# EAGLE board Temp_Ctrlr_Board_final (EAGLE 9.7.0)
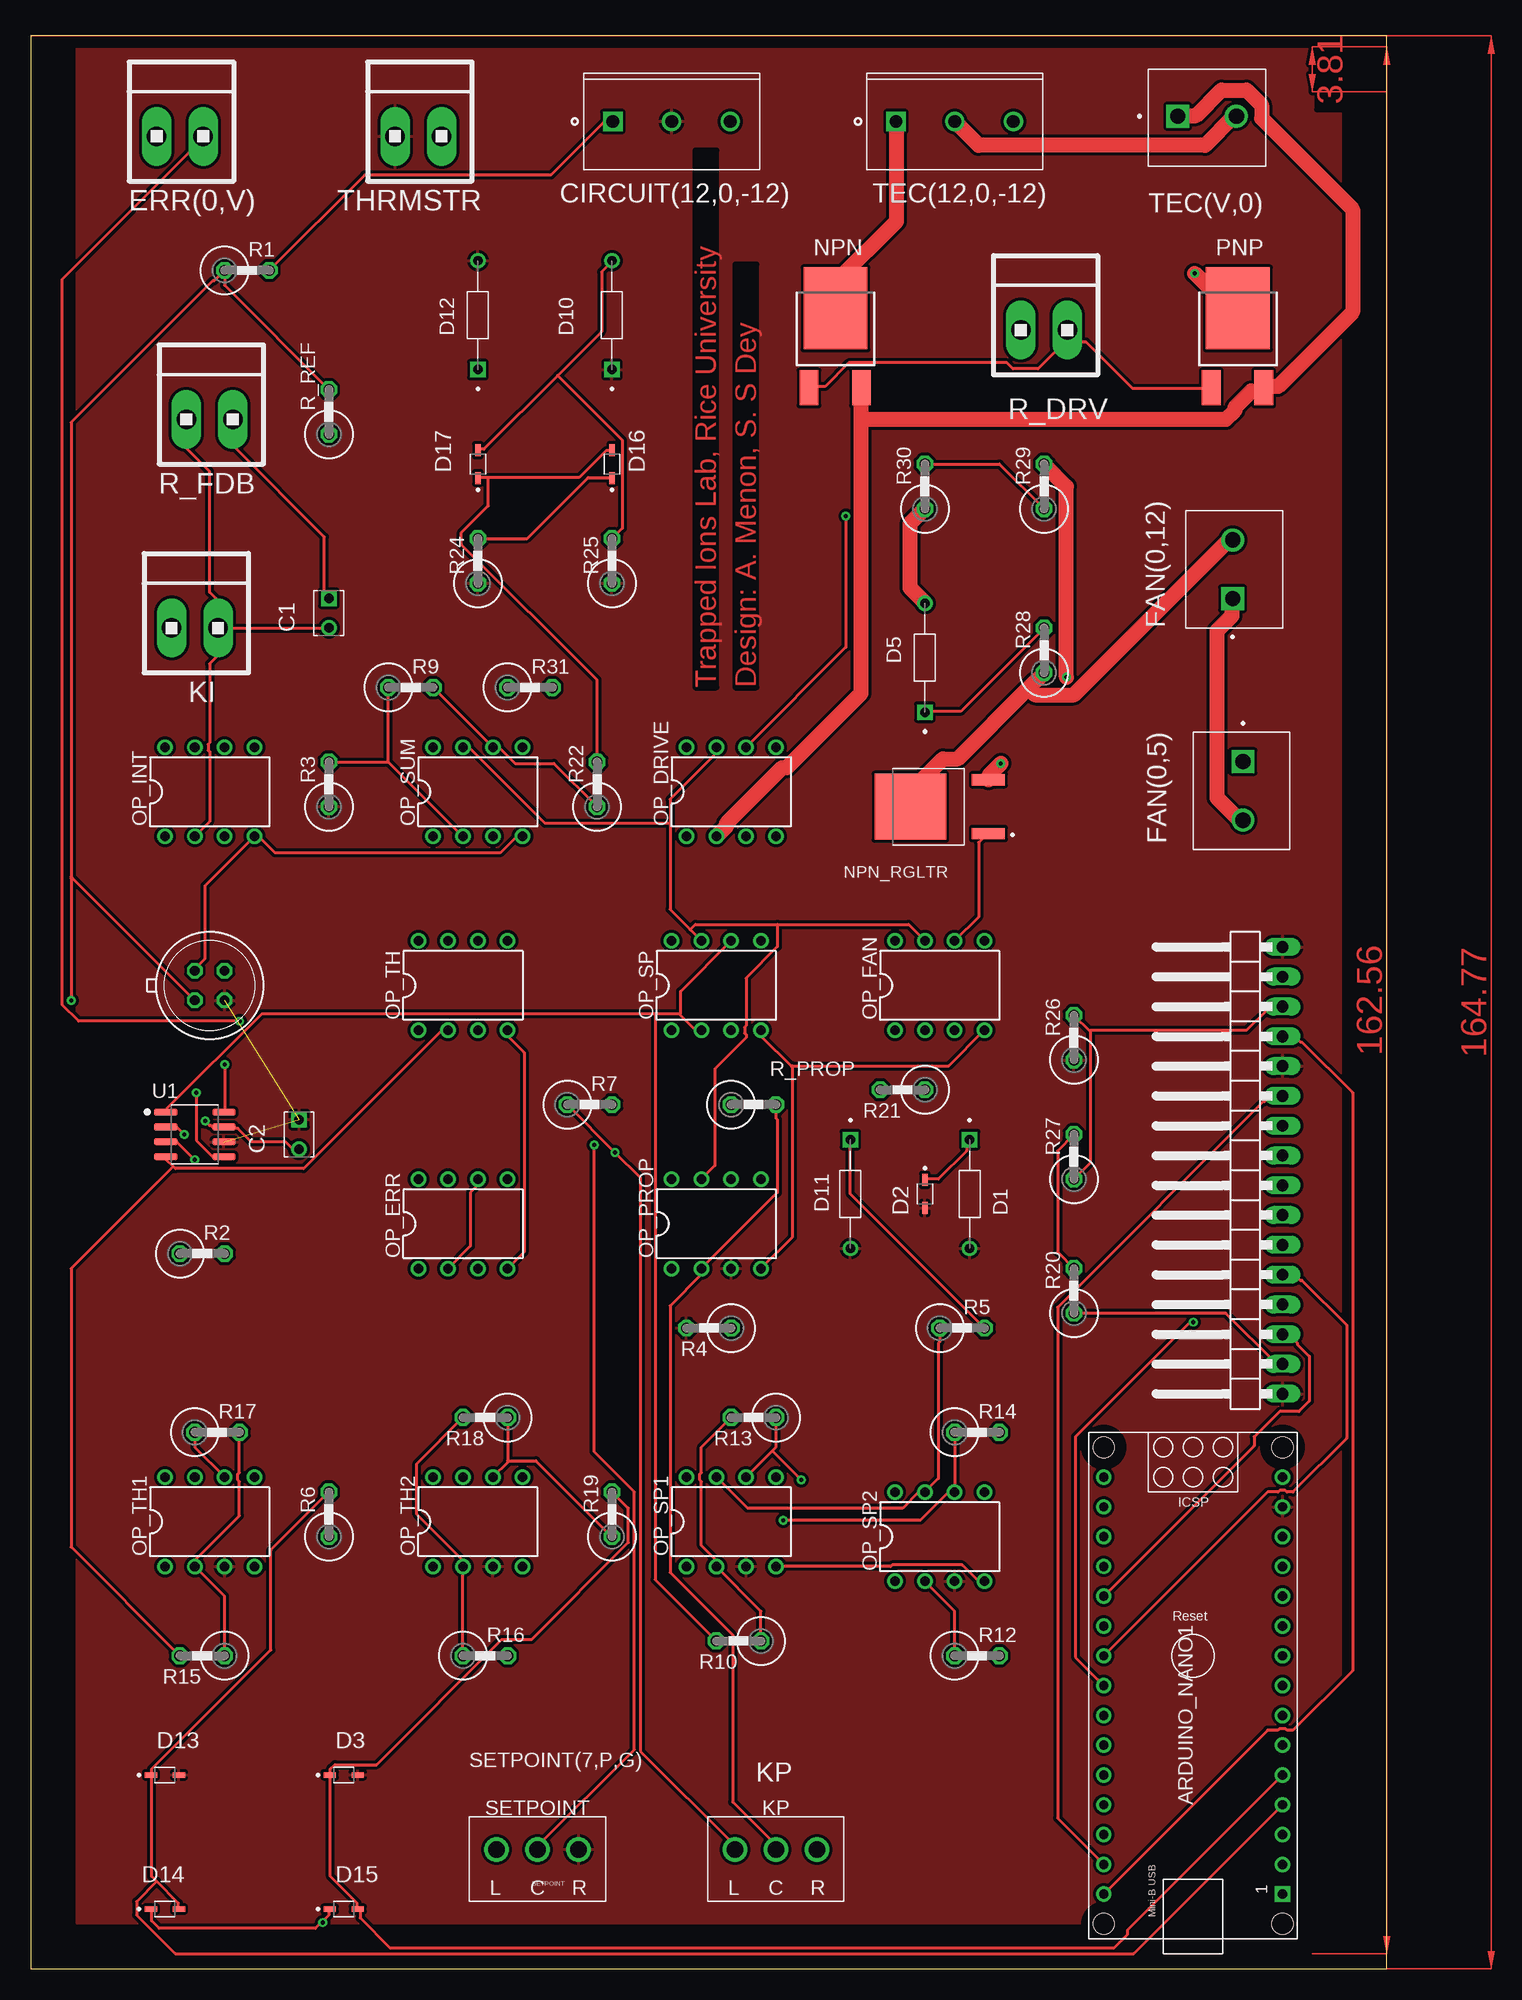
[diagram p0: board, top side]
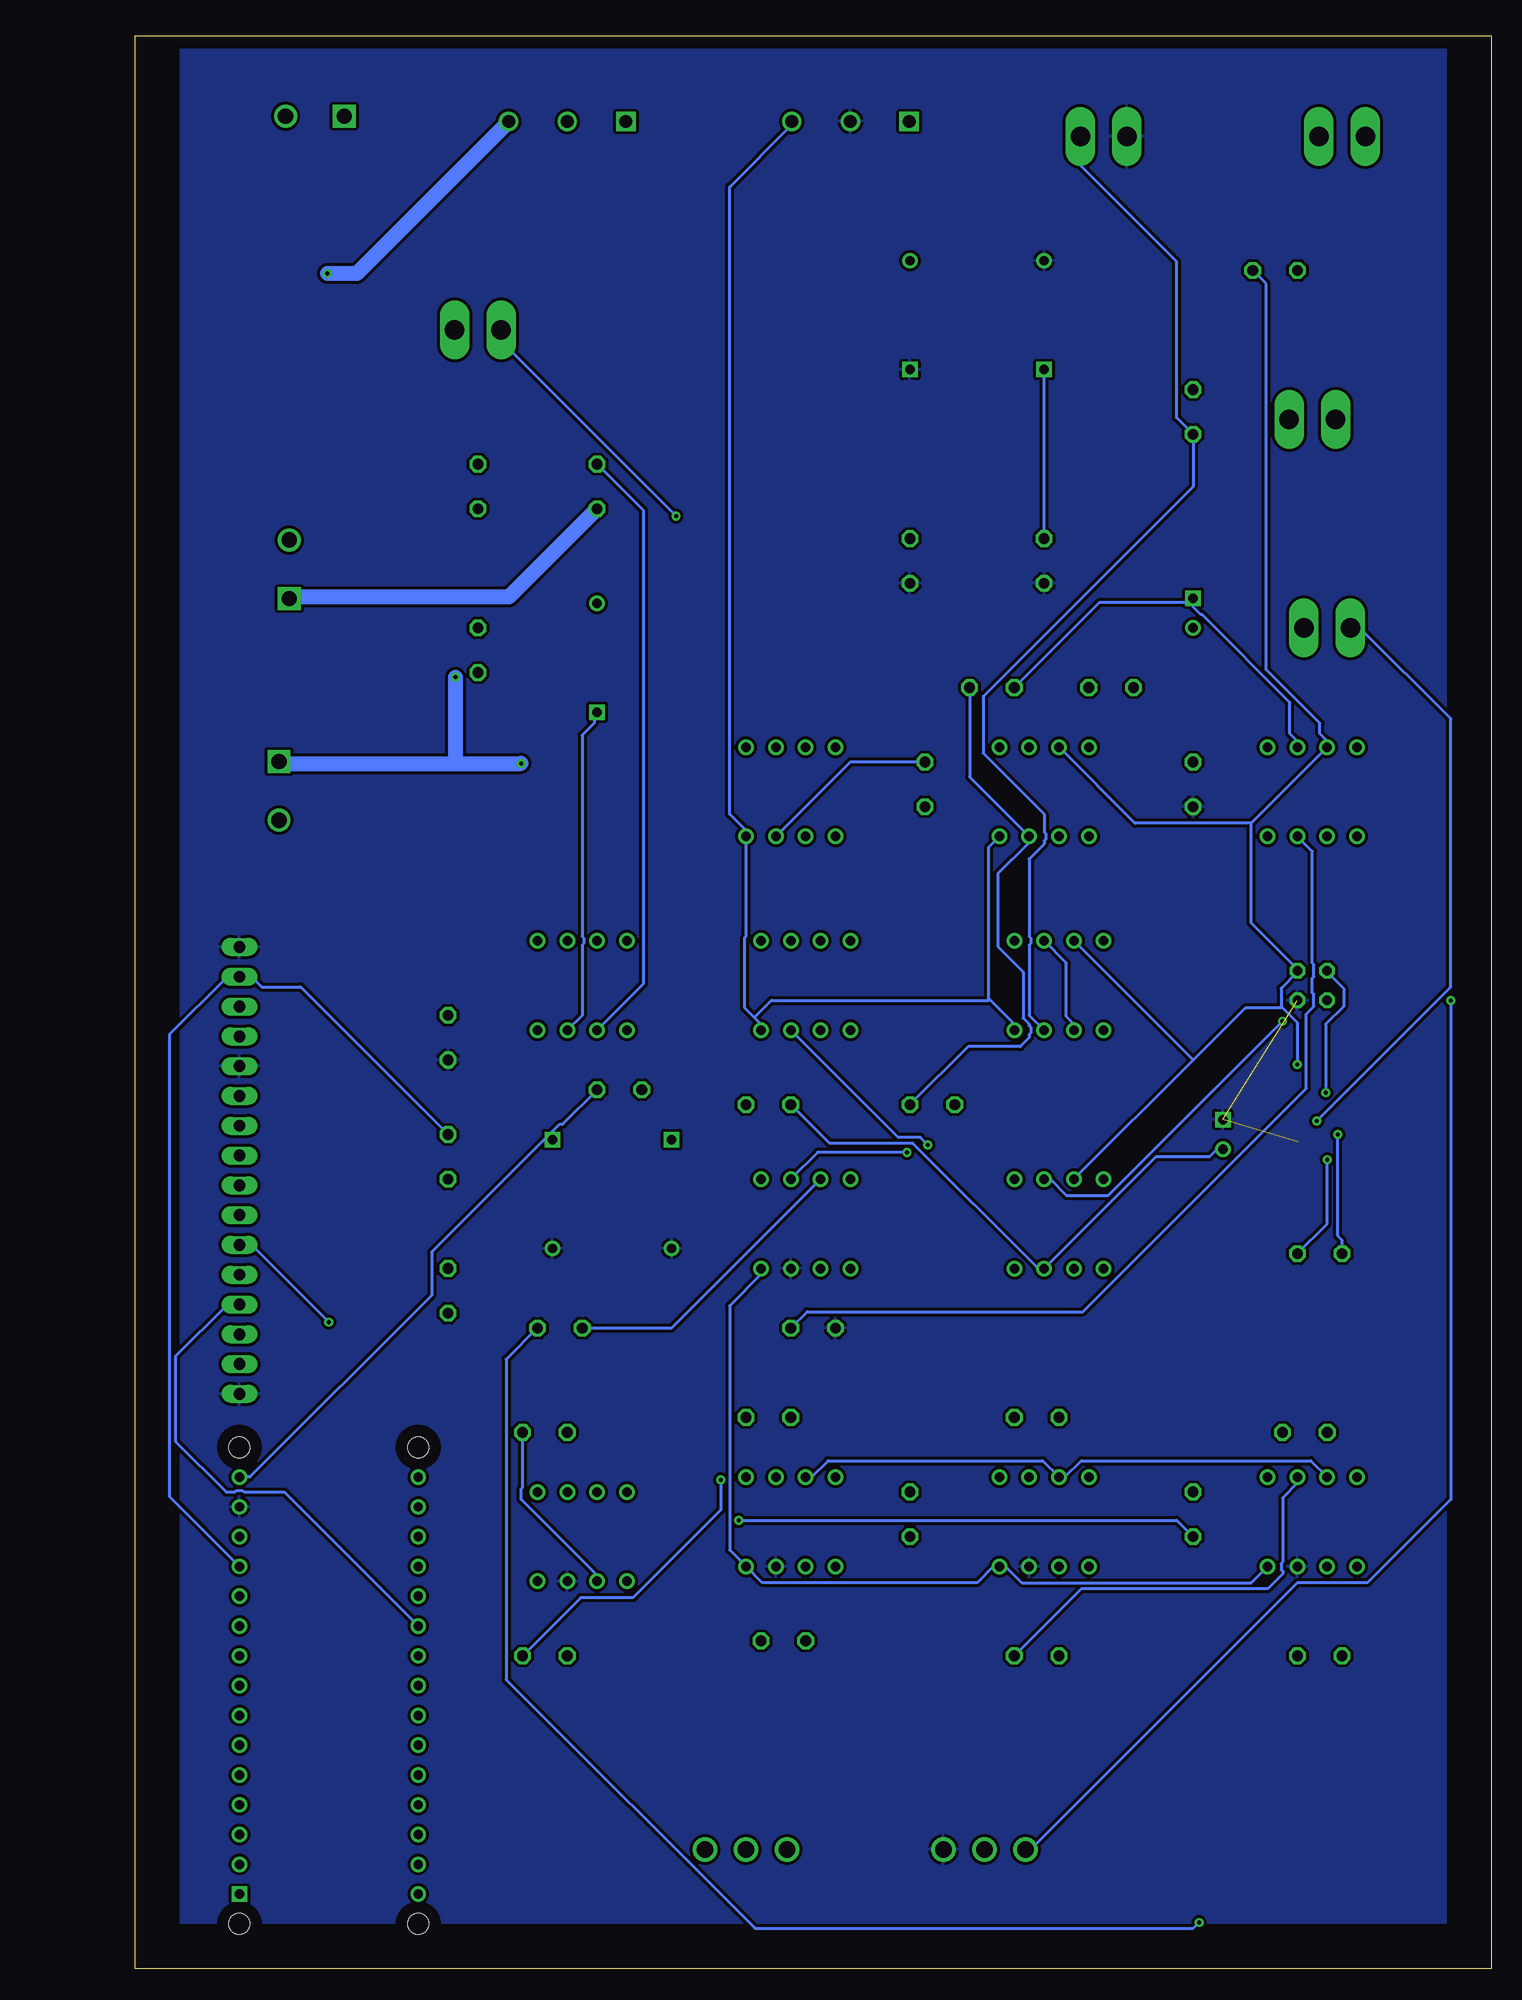
[diagram p1: board, bottom side, seen from below]

Size 115.55 x 164.77 mm. Coordinates in mm from the lower left corner, seen from the top.
Outline: 0,0 115.55,0 115.55,164.77 0,164.77 0,0
Copper layers (1*16): Top 0.035mm / dielectric 1.5mm / Bottom 0.035mm
Design rules "default": minimum track width 6mil, minimum drill 0.35mm, track to track 6mil, track to pad 6mil, pad to pad 6mil, via to via 6mil, smd to smd 6mil, copper to edge 40mil, drill to drill 6mil, minimum pad ring 10mil, minimum via ring 8mil, stop-mask expansion 4mil, vias tented up to drill 0mil, thermal gap 10mil
Net classes: 0 default: width 0.254 mm, clearance 0.254 mm; 1 opamp_driving: width 0.254 mm, clearance 0.254 mm; 2 TEC_driving: width 1.27 mm, clearance 0.254 mm; 3 INA: width 0.254 mm, clearance 0.254 mm; 4 Fan: width 1.27 mm, clearance 0.254 mm

## Footprints (pad centres in the part's own frame; a part is rotated, then mirrored left to right if it is on the bottom)
ARDUINO_NANO = drill 0.8 square: 1 -20.32,-7.62 | drill 0.8: 2 -17.78,-7.62; 3 -15.24,-7.62; 4 -12.7,-7.62; 5 -10.16,-7.62; 6 -7.62,-7.62; 7 -5.08,-7.62; 8 -2.54,-7.62; 9 0,-7.62; 10 2.54,-7.62; 11 5.08,-7.62; 12 7.62,-7.62; 13 10.16,-7.62; 14 12.7,-7.62; 15 15.24,-7.62; 16 15.24,7.62; 17 12.7,7.62; 18 10.16,7.62; 19 7.62,7.62; 20 5.08,7.62; 21 2.54,7.62; 22 0,7.62; 23 -2.54,7.62; 24 -5.08,7.62; 25 -7.62,7.62; 26 -10.16,7.62; 27 -12.7,7.62; 28 -15.24,7.62; 29 -17.78,7.62; 30 -20.32,7.62 | hole 1.778: -22.86,-7.62; -22.86,7.62; 17.78,7.62; 17.78,-7.62
CAPRR254W54L381T254H466 = drill 0.81 square: 1 -1.27,0 | drill 0.81: 2 1.27,0
TE_282836-3 = drill 1.1 square: 1 -5,0 | drill 1.1: 2 0,0; 3 5,0
DIOAD928W47L399D179 = drill 0.8: A 4.64,0 | drill 0.8 square: C -4.64,0
SOD2513X120N = smd 1.04 x 0.46: A 1.19,0; C -1.19,0
1X2MTA = drill 1.676 long: 1 1.981,0; 2 -1.981,0
PHOENIX_1935161 = drill 1.3 square: 1 2.5,4.25 | drill 1.3: 2 7.5,4.25
TO39/4 = drill 0.813 octagon: 1 -1.27,-1.27; 2 1.27,-1.27; 3 1.27,1.27; 4 -1.27,1.27
691322110003 = drill 1.4: C 0,0; L -3.5,0; R 3.5,0
DPAK = smd 1.6 x 2.997: 1 -2.261,-4.928; 3 2.21,-4.928 | smd 5.452 x 7: 4 0,1.853
TO229P990X238-3N = smd 2.83 x 0.97: 1 -4.14,2.29; 3 -4.14,-2.29 | smd 6.09 x 5.63: 4 2.51,0
DIL08 = drill 0.813 pad 1.27: 1 -3.81,-3.81; 2 -1.27,-3.81; 3 1.27,-3.81; 4 3.81,-3.81; 5 3.81,3.81; 6 1.27,3.81; 7 -1.27,3.81; 8 -3.81,3.81
0411V = drill 0.914 octagon: 1 -2.54,0; 2 1.27,0
1X16/90 = drill 1.016 long: 1 -19.05,-3.81; 2 -16.51,-3.81; 3 -13.97,-3.81; 4 -11.43,-3.81; 5 -8.89,-3.81; 6 -6.35,-3.81; 7 -3.81,-3.81; 8 -1.27,-3.81; 9 1.27,-3.81; 10 3.81,-3.81; 11 6.35,-3.81; 12 8.89,-3.81; 13 11.43,-3.81; 14 13.97,-3.81; 15 16.51,-3.81; 16 19.05,-3.81
SOIC127P600X175-8N = smd 1.97 x 0.6: 1 -2.475,1.905; 2 -2.475,0.635; 3 -2.475,-0.635; 4 -2.475,-1.905; 5 2.475,-1.905; 6 2.475,-0.635; 7 2.475,0.635; 8 2.475,1.905

## Placement (x,y rotation side)
ARDUINO_NANO1  [ARDUINO_NANO]  99.06,26.67 90 top
C1  C315C470J1G5TA  [CAPRR254W54L381T254H466]  25.4,115.57 270 top
C2  C315C470J1G5TA  [CAPRR254W54L381T254H466]  22.86,71.12 270 top
CIRCUIT(12,0,-12)  282836-3  [TE_282836-3]  54.61,157.48 0 top
D1  1N5237B_A0  [DIOAD928W47L399D179]  80.01,66.04 270 top
D2  BAT760-7  [SOD2513X120N]  76.2,66.04 270 top
D3  BAT760-7  [SOD2513X120N]  26.67,16.51 0 top
D5  1N5231B  [DIOAD928W47L399D179]  76.2,111.76 90 top
D10  1N5231B  [DIOAD928W47L399D179]  49.53,140.97 90 top
D11  1N5226B_R0G  [DIOAD928W47L399D179]  69.85,66.04 270 top
D12  1N5231B  [DIOAD928W47L399D179]  38.1,140.97 90 top
D13  BAT760-7  [SOD2513X120N]  11.43,16.51 0 top
D14  BAT760-7  [SOD2513X120N]  11.43,5.08 0 top
D15  BAT760-7  [SOD2513X120N]  26.67,5.08 0 top
D16  BAT760-7  [SOD2513X120N]  49.53,128.27 90 top
D17  BAT760-7  [SOD2513X120N]  38.1,128.27 90 top
ERR(0,V)  [1X2MTA]  12.7,156.21 0 top
FAN(0,5)  1935161  [PHOENIX_1935161]  99.06,105.41 270 top
FAN(0,12)  1935161  [PHOENIX_1935161]  106.68,114.3 90 top
IC2  LM399H  [TO39/4]  15.24,83.82 0 top
KI  [1X2MTA]  13.97,114.3 0 top
KP  691321100003  [691322110003]  63.5,10.16 0 top
NPN  MJD122  [DPAK]  68.58,139.7 0 top
NPN_RGLTR  NJD2873T4G  [TO229P990X238-3N]  77.47,99.06 180 top
OP_DRIVE  OPA227P  [DIL08]  59.69,100.33 0 top
OP_ERR  OPA227P  [DIL08]  36.83,63.5 0 top
OP_FAN  OPA227P  [DIL08]  77.47,83.82 0 top
OP_INT  OPA227P  [DIL08]  15.24,100.33 0 top
OP_PROP  OPA227P  [DIL08]  58.42,63.5 0 top
OP_SP  OPA227P  [DIL08]  58.42,83.82 0 top
OP_SP1  OPA227P  [DIL08]  59.69,38.1 0 top
OP_SP2  OPA227P  [DIL08]  77.47,36.83 0 top
OP_SUM  OPA227P  [DIL08]  38.1,100.33 0 top
OP_TH  OPA227P  [DIL08]  36.83,83.82 0 top
OP_TH1  OPA227P  [DIL08]  15.24,38.1 0 top
OP_TH2  OPA227P  [DIL08]  38.1,38.1 0 top
PNP  MJD122  [DPAK]  102.87,139.7 0 top
R1  7.5k  [0411V]  19.05,144.78 0 top
R2  [0411V]  15.24,60.96 0 top
R3  [0411V]  25.4,101.6 90 top
R4  [0411V]  57.15,54.61 180 top
R5  178  [0411V]  80.01,54.61 0 top
R6  100  [0411V]  25.4,39.37 90 top
R7  [0411V]  48.26,73.66 0 top
R9  [0411V]  33.02,109.22 0 top
R10  200k  [0411V]  59.69,27.94 180 top
R12  50k  [0411V]  81.28,26.67 0 top
R13  75k  [0411V]  60.96,46.99 180 top
R14  50k  [0411V]  81.28,45.72 0 top
R15  200k  [0411V]  13.97,26.67 180 top
R16  50k  [0411V]  39.37,26.67 0 top
R17  75k  [0411V]  16.51,45.72 0 top
R18  50k  [0411V]  38.1,46.99 180 top
R19  100  [0411V]  49.53,39.37 90 top
R20  [0411V]  88.9,58.42 90 top
R21  410  [0411V]  73.66,74.93 180 top
R22  [0411V]  48.26,101.6 90 top
R24  [0411V]  38.1,120.65 90 top
R25  [0411V]  49.53,120.65 90 top
R26  [0411V]  88.9,80.01 90 top
R27  [0411V]  88.9,69.85 90 top
R28  [0411V]  86.36,113.03 90 top
R29  [0411V]  86.36,127 90 top
R30  [0411V]  76.2,127 90 top
R31  [0411V]  43.18,109.22 0 top
R_DRV  [1X2MTA]  86.36,139.7 0 top
R_FDB  [1X2MTA]  15.24,132.08 0 top
R_PROP  [0411V]  62.23,73.66 0 top
R_REF  100k  [0411V]  25.4,133.35 90 top
SETPOINT  691321100003  [691322110003]  43.18,10.16 0 top
SETPOINT(7,P,G)  PINHD-1X16/90  [1X16/90]  102.87,68.05 90 top
TEC(12,0,-12)  282836-3  [TE_282836-3]  78.74,157.48 0 top
TEC(V,0)  1935161  [PHOENIX_1935161]  95.25,153.67 0 top
THRMSTR  THRMSTR  [1X2MTA]  33.02,156.21 0 top
U1  AD8422BRZ  [SOIC127P600X175-8N]  13.97,71.12 0 top

## Library data of the parts
ARDUINO_NANO1 = ArduinoNanoV30
C1 C2 = C315C470J1G5TA; AVAILABILITY: In Stock; CHECK_PRICES: https://www.snapeda.com/parts/C315C470J1G5TA/KEMET/view-part/?ref=eda; DESCRIPTION: Capacitor: ceramic; MLCC, monolithic; 47pF; 100V; C0G; ±5%; THT; MF: KEMET; MP: C315C470J1G5TA; PACKAGE: Radial Kemet; PRICE: None; PURCHASE-URL: https://www.snapeda.com/api/url_track_click_mouser/?unipart_id=1769422&manufacturer=KEMET&part_name=C315C470J1G5TA&search_term=through hole capacitor; SNAPEDA_LINK: https://www.snapeda.com/parts/C315C470J1G5TA/KEMET/view-part/?ref=snap
CIRCUIT(12,0,-12) TEC(12,0,-12) = 282836-3; AVAILABILITY: In Stock; CHECK_PRICES: https://www.snapeda.com/parts/282836-3/TE+Connectivity+AMP+Connectors/view-part/?ref=eda; COMMENT: 282836-3; DESCRIPTION: Terminal Block Connector Wire Receptacle 3 5 mm 30-16 AWG Green 13.5 A 300 V | TE Connectivity 282836-3; EU_ROHS_COMPLIANCE: Compliant with Exemptions; MF: TE Connectivity; MP: 282836-3; PACKAGE: None; PRICE: None; PURCHASE-URL: https://www.snapeda.com/api/url_track_click_mouser/?unipart_id=134023&manufacturer=TE Connectivity&part_name=282836-3&search_term=282836-3; SNAPEDA_LINK: https://www.snapeda.com/parts/282836-3/TE+Connectivity+AMP+Connectors/view-part/?ref=snap
D1 = 1N5237B_A0; AVAILABILITY: In Stock; CHECK_PRICES: https://www.snapeda.com/parts/1N5237B%20A0/Taiwan+Semiconductor/view-part/?ref=eda; DESCRIPTION: DO-35, 500mW, 5%, Small Signal Zener Diode; MF: Taiwan Semiconductor; MP: 1N5237B A0; PACKAGE: DO-35-2 Taiwan Semiconductor; PRICE: None; SNAPEDA_LINK: https://www.snapeda.com/parts/1N5237B%20A0/Taiwan+Semiconductor/view-part/?ref=snap
D2 D3 D13-D17 = BAT760-7; AVAILABILITY: In Stock; CHECK_PRICES: https://www.snapeda.com/parts/BAT760-7/Diodes+Inc./view-part/?ref=eda; DESCRIPTION: Diode Schottky 30V 1A 2Pin SOD323 | Diodes Inc BAT760-7; MF: Diodes Inc.; MP: BAT760-7; PACKAGE: SOD-323 Diodes Inc.; PRICE: None; PURCHASE-URL: https://www.snapeda.com/api/url_track_click_mouser/?unipart_id=318039&manufacturer=Diodes Inc.&part_name=BAT760-7&search_term=sod-323; SNAPEDA_LINK: https://www.snapeda.com/parts/BAT760-7/Diodes+Inc./view-part/?ref=snap
D5 D10 D12 = 1N5231B; AVAILABILITY: In Stock; CHECK_PRICES: https://www.snapeda.com/parts/1N5231B/Taiwan+Semiconductor/view-part/?ref=eda; DESCRIPTION: Zener Diode Single 5.1V 5% 17Ohm 500mW 2-Pin DO-35 T/R; MF: Taiwan Semiconductor; MP: 1N5231B; PACKAGE: DO-35-2 Taiwan Semiconductor; PRICE: None; SNAPEDA_LINK: https://www.snapeda.com/parts/1N5231B/Taiwan+Semiconductor/view-part/?ref=snap
D11 = 1N5226B_R0G; AVAILABILITY: In Stock; CHECK_PRICES: https://www.snapeda.com/parts/1N5226B%20R0G/Taiwan+Semiconductor/view-part/?ref=eda; DESCRIPTION: DO-35, 500mW, 5%, Small Signal Zener Diode; MF: Taiwan Semiconductor; MP: 1N5226B R0G; PACKAGE: DO-35-2 Taiwan Semiconductor; PRICE: None; SNAPEDA_LINK: https://www.snapeda.com/parts/1N5226B%20R0G/Taiwan+Semiconductor/view-part/?ref=snap
ERR(0,V) KI R_DRV R_FDB THRMSTR = con-amp
FAN(0,5) FAN(0,12) TEC(V,0) = 1935161; AVAILABILITY: In Stock; CHECK_PRICES: https://www.snapeda.com/parts/1935161/Phoenix+Contact/view-part/?ref=eda; DESCRIPTION: PCB Terminal Screw 5mm 16AWG 400V 17.5A 2 Position COMBICON PT Series | Phoenix Contact 1935161; MF: Phoenix Contact; MP: 1935161; PACKAGE: None; PRICE: None; PURCHASE-URL: https://www.snapeda.com/api/url_track_click_mouser/?unipart_id=423515&manufacturer=Phoenix Contact&part_name=1935161&search_term=1935161; SNAPEDA_LINK: https://www.snapeda.com/parts/1935161/Phoenix+Contact/view-part/?ref=snap
IC2 = LM399H; AVAILABILITY: In Stock; CHECK_PRICES: https://www.snapeda.com/parts/LM399H/Analog+Devices/view-part/?ref=eda; DESCRIPTION: Shunt Voltage Reference IC Fixed 6.95V V ±0.17% 10 mA TO-46-4; MF: Analog Devices Inc.; MP: LM399H; PACKAGE: None; PRICE: None; PURCHASE-URL: https://www.snapeda.com/api/url_track_click_mouser/?unipart_id=9190342&manufacturer=Analog Devices Inc.&part_name=LM399H&search_term=lm399; SNAPEDA_LINK: https://www.snapeda.com/parts/LM399H/Analog+Devices/view-part/?ref=snap
KP SETPOINT = 691321100003; AVAILABILITY: In Stock; CHECK_PRICES: https://www.snapeda.com/parts/691321100003/Wurth+Electronics+Inc./view-part/?ref=eda; DESCRIPTION: 3 Position Terminal Block Header, Male Pins, Shrouded (4 Side) 0.138 (3.50mm) Vertical - Through Hole; MF: Wurth Electronics; MP: 691321100003; PACKAGE: None; PRICE: None; PURCHASE-URL: https://www.snapeda.com/api/url_track_click_mouser/?unipart_id=1195106&manufacturer=Wurth Electronics&part_name=691321100003&search_term=term block 3pos 3.5mm; SNAPEDA_LINK: https://www.snapeda.com/parts/691321100003/Wurth+Electronics+Inc./view-part/?ref=snap
NPN PNP = MJD122; AVAILABILITY: Not in stock; CHECK_PRICES: https://www.snapeda.com/parts/MJD122/Onsemi/view-part/?ref=eda; DESCRIPTION: Bipolar (BJT) Transistor NPN - Darlington 100V 8A 1.75W Surface Mount D-Pak; MF: ON Semiconductor; MP: MJD122; PACKAGE: DPAK-3 ON Semiconductor; PRICE: None; SNAPEDA_LINK: https://www.snapeda.com/parts/MJD122/Onsemi/view-part/?ref=snap
NPN_RGLTR = NJD2873T4G; AVAILABILITY: In Stock; CHECK_PRICES: https://www.snapeda.com/parts/NJD2873T4G/Onsemi/view-part/?ref=eda; DESCRIPTION: ON Semi NJD2873T4G NPN Bipolar Transistor, 2 A, 50 V, 3-Pin DPAK | ON Semiconductor NJD2873T4G; MF: ON Semiconductor; MP: NJD2873T4G; PACKAGE: DPAK-3 ON Semiconductor; PRICE: None; PURCHASE-URL: https://www.snapeda.com/api/url_track_click_mouser/?unipart_id=371921&manufacturer=ON Semiconductor&part_name=NJD2873T4G&search_term=njd2873t4g; SNAPEDA_LINK: https://www.snapeda.com/parts/NJD2873T4G/Onsemi/view-part/?ref=snap
OP_DRIVE OP_ERR OP_FAN OP_INT OP_PROP OP_SP OP_SP1 OP_SP2 OP_SUM OP_TH OP_TH1 OP_TH2 = linear
R1-R7 R9 R10 R12-R22 R24-R31 R_PROP R_REF = rcl; SPICEPREFIX: R
SETPOINT(7,P,G) = Connector; CATEGORY: Headers; DESCRIPTION: Header, Right Angle, 16 Position; MANUFACTURER: Generic; MPN: Generic; OPERATING_TEMPERATURE: Generic; PART_STATUS: Active; PITCH: 0.100" (2.54mm); ROHS_COMPLIANCE: Generic; SERIES: Generic; SUB-CATEGORY: Headers, Male Pins; TYPE: Board to Board or Cable, Unshrouded, Through Hole, Right Angle
U1 = AD8422BRZ; AVAILABILITY: In Stock; CHECK_PRICES: https://www.snapeda.com/parts/AD8422BRZ/Analog+Devices/view-part/?ref=eda; DESCRIPTION: High Performance, Low Power, Rail-to-Rail Precision Instrumentation Amplifier; MF: Analog Devices; MP: AD8422BRZ; PACKAGE: SOIC-8 Analog Devices; PRICE: None; SNAPEDA_LINK: https://www.snapeda.com/parts/AD8422BRZ/Analog+Devices/view-part/?ref=snap

## Nets
0: ARDUINO_NANO1.14 C2.1 CIRCUIT(12,0,-12).2 D1.A D2.A D3.A D10.C D11.A D12.A D13.A IC2.2 OP_PROP.3 OP_SP1.3 OP_SP2.3 OP_TH1.3 OP_TH2.3 R3.1 R4.2 R24.1 R25.1 R26.1 SETPOINT(7,P,G).1 SETPOINT(7,P,G).12 SETPOINT(7,P,G).16 SETPOINT.R THRMSTR.2 U1.6
3.3V: D11.C D14.C D15.C R5.2
8.2V: ARDUINO_NANO1.15 D1.C D2.C R21.1
12V: CIRCUIT(12,0,-12).1 IC2.3 OP_DRIVE.7 OP_ERR.7 OP_FAN.7 OP_INT.7 OP_PROP.7 OP_SP1.7 OP_SP2.7 OP_SP.7 OP_SUM.7 OP_TH1.7 OP_TH2.7 OP_TH.7 R1.2 R5.1 U1.8
12V_HIGH [Fan]: FAN(0,12).2 NPN_RGLTR.4 R28.1
12V_TEC [TEC_driving]: NPN.4 TEC(12,0,-12).1
-12V: CIRCUIT(12,0,-12).3 IC2.4 OP_DRIVE.4 OP_ERR.4 OP_FAN.4 OP_INT.4 OP_PROP.4 OP_SP1.4 OP_SP2.4 OP_SP.4 OP_SUM.4 OP_TH1.4 OP_TH2.4 OP_TH.4 U1.5
-12V_TEC [TEC_driving]: PNP.4 TEC(12,0,-12).3
AD1 [INA]: OP_SP.2 OP_SP.6 R10.2 U1.1
AD4 [INA]: OP_TH.2 OP_TH.6 R15.2 U1.4
AD7 [INA]: C2.2 KI.2 OP_ERR.3 R_PROP.1 U1.7
FAN_GND [Fan]: D5.A FAN(0,5).2 FAN(0,12).1 R30.1
FAN_HIGH [Fan]: FAN(0,5).1 NPN_RGLTR.3 R29.2
GND: ARDUINO_NANO1.19
N$1: OP_INT.3 R4.1
N$2: OP_TH.3 R_REF.1 THRMSTR.1
N$3: OP_SUM.6 R9.2 R22.1
N$4: OP_SP.3 SETPOINT.C
N$5: R2.2 U1.3
N$7: KP.L OP_PROP.6 R7.1
N$8: R2.1 U1.2
N$9: C1.2 KI.1 OP_INT.2 R_FDB.2
N$10: OP_SUM.3 R7.2 R31.2
N$11: OP_DRIVE.6 R_DRV.2
N$12: NPN.1 PNP.1 R_DRV.1
N$13: OP_SP1.2 R10.1 R13.2
N$14: OP_SP1.6 R12.2 R13.1
N$16: OP_SUM.2 R3.2 R9.1
N$18: OP_SP2.2 R12.1 R14.2
N$19: OP_SP2.6 R6.1 R14.1
N$20: OP_TH1.2 R15.1 R17.2
N$21: OP_TH1.6 R16.2 R17.1
N$22: OP_TH2.2 R16.1 R18.2
N$23: OP_TH2.6 R18.1 R19.1
N$24: ARDUINO_NANO1.4 D13.C D14.A R6.2
N$25: ARDUINO_NANO1.5 D3.C D15.A R19.2
N$26: ERR(0,V).1 OP_ERR.2 OP_ERR.6
N$27: ARDUINO_NANO1.29 SETPOINT(7,P,G).11
N$28: ARDUINO_NANO1.20 SETPOINT(7,P,G).3
N$29: ARDUINO_NANO1.21 SETPOINT(7,P,G).4
N$30: ARDUINO_NANO1.22 SETPOINT(7,P,G).5
N$31: ARDUINO_NANO1.23 SETPOINT(7,P,G).6
N$32: R20.1 SETPOINT(7,P,G).2
N$33: R26.2 R27.1 SETPOINT(7,P,G).14
N$34: ARDUINO_NANO1.12 R20.2 R27.2 SETPOINT(7,P,G).15
N$35: ARDUINO_NANO1.30 SETPOINT(7,P,G).13
N$38: D16.A D17.C OP_DRIVE.3 R22.2
N$39: D12.C D16.C R24.2
N$40: D10.A D17.A R25.2
N$41: C1.1 OP_INT.6 R31.1 R_FDB.1
N$42: KP.C OP_PROP.2 R_PROP.2
N$44: D5.C OP_FAN.3 R28.2
N$45: OP_FAN.2 R29.1 R30.2
N$47: NPN_RGLTR.1 OP_FAN.6
RGLTR_OUT: IC2.1 R1.1 R_REF.2 SETPOINT.L
TEC_GND [TEC_driving]: TEC(12,0,-12).2 TEC(V,0).2
TEC_PLUS [TEC_driving]: NPN.3 OP_DRIVE.2 PNP.3 TEC(V,0).1
VCC: R21.2

## Tracks (layer width: path | path; a pad name or v marks a point on that pad's centre or on a via)
0  (2 unrouted)
  pour Top: 3.89,3.89 111.68,3.89 111.68,163.75 3.89,163.75
  pour Bottom: 3.89,3.89 111.68,3.89 111.68,163.75 3.89,163.75
3.3V  (via drill 0.35)
  Top 0.254: 24.83,4 25.4,4.57 25.4,5.08 D15.C | 24.83,4 24.26,3.43 10.92,3.43 10.29,4.06 10.29,5.08 D14.C | D11.C 69.85,66.04 R5.2 | v24.89,3.94 24.83,4
  Bottom 0.254: v24.89,3.94 25.4,3.43 62.74,3.43 83.95,24.64 83.95,51.94 R5.2
8.2V
  Top 0.254: D2.C 76.2,67.31 77.34,67.31 79.76,69.72 79.76,70.36 80.01,70.61 D1.C
  Bottom 0.254: ARDUINO_NANO1.15 105.79,41.91 90.3,57.4 90.3,61.09 80.65,70.74 80.14,70.74 | 80.14,70.74 80.01,70.74 D1.C 80.14,70.74 | R21.1 79.12,72.01 79.38,72.01 80.14,71.25 80.14,70.74
12V  (via drill 0.35)
  Top 0.254: R5.1 77.47,53.47 77.34,53.34 77.34,41.78 OP_SP2.7 75.69,40.64 74.3,39.24 61.09,39.24 OP_SP1.7 | R1.2 28.45,152.91 44.32,152.91 48.9,157.48 CIRCUIT(12,0,-12).1 | 56.2,88.58 54.48,90.3 54.48,97.66 | 56.2,88.58 OP_SP.7 | 54.48,97.66 54.48,99.69 58.42,103.63 OP_DRIVE.7 | OP_FAN.7 74.8,89.03 63.63,89.03 | 63.63,89.03 56.64,89.03 56.2,88.58 | v16.51,77.09 16.51,73.03 U1.8 | 54.48,97.66 43.81,97.66 37.34,104.14 OP_SUM.7 | OP_PROP.7 58.29,68.45 58.29,76.71 60.96,79.38 60.96,79.63 60.83,79.76 60.83,80.26 60.96,80.39 60.96,84.45 63.63,87.12 63.63,89.03
  Bottom 0.254: OP_TH1.7 15.37,43.31 34.92,43.31 36.32,41.91 OP_TH2.7 38.23,43.31 56.52,43.31 57.91,41.91 OP_SP1.7 | OP_PROP.7 69.85,54.61 R5.1 | v16.51,77.09 16.51,80.64 17.84,81.98 | 17.84,81.98 17.91,82.04 17.91,83.57 16.51,84.96 IC2.3 16.51,85.22 20.45,89.15 20.45,97.66 | 25.4,77.47 20.95,81.91 17.91,81.91 17.84,81.98 | 25.4,77.47 OP_ERR.7 | 20.45,97.66 OP_INT.7 14.1,104.14 14.1,104.78 14.61,105.28 14.61,106.17 19.18,110.74 19.18,143.64 R1.2 | 25.4,77.47 OP_TH.7 | OP_SUM.7 30.35,97.66 20.45,97.66
12V_HIGH
  Top 1.27: 85.03,109.16 78.99,103.12 77.72,103.12 75.06,100.46 75.06,99.06 NPN_RGLTR.4 | 85.03,109.16 R28.1 | FAN(0,12).2 102.36,121.79 102.11,121.79 88.9,108.59 85.6,108.59 85.03,109.16
12V_TEC
  Top 1.27: NPN.4 68.58,143.76 73.79,148.97 73.79,157.48 TEC(12,0,-12).1
-12V  (via drill 0.35)
  Top 0.254: U1.5 15.49,69.22 14.1,70.61 v14.1,74.68 | IC2.4 13.97,85.22 14.86,86.11 14.86,92.33 OP_INT.4 19.05,96.39 19.56,96.39 20.83,95.12 40,95.12 41.4,96.52 OP_SUM.4 | OP_ERR.4 42.04,61.09 42.04,78.11 40.64,79.5 OP_TH.4 | OP_SP1.4 73.28,34.29 73.41,34.42 79.38,34.42 80.77,33.02 OP_SP2.4 | OP_PROP.4 64.9,62.36 64.9,76.83 64.83,76.9 | 64.83,76.9 62.23,79.5 OP_SP.4 | OP_FAN.4 78.23,76.96 64.9,76.96 64.83,76.9
  Bottom 0.254: v14.1,74.68 14.1,80.52 12.57,82.04 12.57,83.57 13.97,84.96 IC2.4 | OP_SUM.4 42.8,95.63 42.8,82.68 42.73,82.61 | 42.73,82.61 40.64,80.52 OP_TH.4 | OP_TH1.4 20.45,32.89 40,32.89 41.4,34.29 OP_TH2.4 42.42,34.29 43.81,32.89 62.1,32.89 OP_SP1.4 64.9,35.69 64.9,56.52 62.23,59.18 OP_PROP.4 | 62.8,81.09 62.23,80.52 OP_SP.4 | 62.8,81.09 63.63,81.91 63.63,87.88 63.5,88.01 OP_DRIVE.4 63.5,97.03 64.9,98.42 64.9,151.89 59.69,157.1 59.69,157.48 CIRCUIT(12,0,-12).3 | 62.8,81.09 61.34,82.55 42.8,82.55 42.73,82.61
-12V_TEC  (via drill 0.35)
  Top 1.27: v99.19,144.53 102.11,141.61 102.87,141.61 PNP.4
  Bottom 1.27: v99.19,144.53 96.65,144.53 83.82,157.35 83.82,157.48 TEC(12,0,-12).3
AD1
  Top 0.254: 53.21,81.41 55.24,81.41 55.31,81.34 | 53.21,81.41 19.69,81.41 11.56,73.28 11.56,73.03 U1.1 | 55.31,81.34 56.64,80.01 OP_SP.2 | OP_SP.6 55.37,83.31 55.37,81.41 55.31,81.34 | R10.2 53.21,33.15 53.21,81.41
AD4
  Top 0.254: 12.13,68.39 12.32,68.2 23.24,68.2 35.05,80.01 OP_TH.2 | 12.13,68.39 11.56,68.96 11.56,69.22 U1.4 | R15.2 3.43,35.94 3.43,59.69 12.13,68.39
  Bottom 0.254: OP_TH.6 36.2,85.72 36.2,81.15 35.56,80.52 OP_TH.2
AD7  (via drill 0.35)
  Top 0.254: C2.2 22.35,69.85 21.72,70.48 18.8,70.48 17.65,71.63 17.53,71.63 17.4,71.75 U1.7 15.49,71.75 15.37,71.88 15.24,71.88 v14.86,72.26
  Bottom 0.254: C2.2 23.37,69.85 24,69.22 28.57,69.22 OP_ERR.3 38.1,59.82 38.73,59.82 49.28,70.36 56.39,70.36 R_PROP.1 | KI.2 11.18,114.3 3.43,106.55 3.43,83.69 v14.86,72.26
FAN_GND
  Top 1.27: R30.1 74.93,123.19 74.93,117.73 76.2,116.46 D5.A | FAN(0,5).2 103.25,97.92 103,97.92 101.09,99.82 101.09,114.05 102.36,115.32 102.36,116.71 FAN(0,12).1
  Bottom 1.27: R30.1 83.69,116.97 102.24,116.97 102.36,116.84 FAN(0,12).1
FAN_HIGH  (via drill 0.35)
  Top 1.27: v82.68,102.74 81.66,101.73 81.66,101.47 NPN_RGLTR.3 | R29.2 88.26,126.36 v88.26,110.11
  Bottom 1.27: 88.26,102.74 103.12,102.74 103.25,102.87 FAN(0,5).1 | 88.26,102.74 v82.68,102.74 | 88.26,102.74 v88.26,110.11
N$1
  Bottom 0.254: OP_INT.3 15.24,95.25 15.24,85.72 15.11,85.6 15.11,84.58 15.24,84.45 15.24,83.19 15.11,83.06 15.11,82.04 15.75,81.41 15.75,75.06 34.8,56.01 58.29,56.01 R4.1
N$2
  Bottom 0.254: OP_TH.3 39.37,81.28 39.37,87.25 39.24,87.38 39.24,87.88 39.37,88.01 39.37,94.61 38.1,95.88 38.1,96.14 37.97,96.27 37.97,96.77 38.1,96.9 38.1,98.42 43.31,103.63 43.31,108.46 25.4,126.36 R_REF.1 26.8,132.21 26.8,145.54 34.92,153.67 34.92,156.21 THRMSTR.1
N$3
  Top 0.254: R9.2 OP_SUM.6 39.88,104.14 41.27,102.74 44.58,102.74 R22.1
N$4  (via drill 0.35)
  Top 0.254: v48.01,70.23 48.01,44.07 51.44,40.64 51.44,18.67 43.18,10.41 SETPOINT.C
  Bottom 0.254: OP_SP.3 50.55,70.87 48.64,70.87 v48.01,70.23
N$5  (via drill 0.35)
  Top 0.254: U1.3 12.45,70.48 v13.97,68.96
  Bottom 0.254: v13.97,68.96 13.97,63.5 R2.2
N$7  (via drill 0.35)
  Top 0.254: R7.1 v49.78,69.6 51.94,67.44 51.94,18.54 59.94,10.54 59.94,10.16 KP.L
  Bottom 0.254: OP_PROP.6 57.4,69.6 v49.78,69.6
N$8  (via drill 0.35)
  Top 0.254: U1.2 12.45,71.75 v13.08,71.12
  Bottom 0.254: v13.08,71.12 13.08,62.48 12.7,62.1 R2.1
N$9
  Top 0.254: C1.2 KI.1 15.88,114.3 | OP_INT.2 15.24,97.79 15.24,103.76 15.11,103.89 15.11,104.39 15.24,104.52 15.24,111.25 15.88,111.89 15.88,114.3 | 15.88,114.3 15.88,116.71 15.24,117.35 15.24,127.63 13.33,129.54 13.33,132.08 R_FDB.2
N$10
  Bottom 0.254: R31.2 44.45,101.6 OP_SUM.3 39.5,96.52 39.5,95.88 42.04,93.34 42.04,87.12 39.88,84.96 39.88,81.03 39.37,80.52 39.37,80.39 39.24,80.26 39.24,79.76 39.37,79.63 39.37,79.38 40.13,78.61 44.58,78.61 R7.2
N$11  (via drill 0.35)
  Top 0.254: OP_DRIVE.6 69.47,112.65 v69.47,123.82
  Bottom 0.254: v69.47,123.82 84.33,138.68 84.33,139.7 R_DRV.2
N$12
  Top 0.254: NPN.1 66.42,134.87 67.69,134.87 69.72,136.91 83.19,136.91 83.69,136.4 85.85,136.4 88.26,138.81 88.26,139.7 R_DRV.1 88.26,138.68 89.92,138.68 93.85,134.75 100.58,134.75 PNP.1
N$13
  Top 0.254: R10.1 62.23,30.48 OP_SP1.2 58.42,34.8 57.15,36.07 57.15,41.53 57.02,41.66 57.02,42.16 57.15,42.29 57.15,44.45 R13.2
N$14  (via drill 0.35)
  Top 0.254: 63.18,44.13 63.5,44.45 R13.1 | 63.18,44.13 OP_SP1.6 | 63.18,44.13 v65.66,41.66
  Bottom 0.254: R12.2 77.6,31.62 73.15,31.62 65.66,39.12 v65.66,41.66
N$16
  Top 0.254: 30.48,102.87 OP_SUM.2 | R3.2 30.48,102.87 | 30.48,102.87 R9.1
N$18
  Top 0.254: OP_SP2.2 78.74,30.48 R12.1
  Bottom 0.254: R14.2 82.55,41.02 82.68,40.89 82.68,40 76.2,33.53 OP_SP2.2
N$19  (via drill 0.35)
  Top 0.254: R14.1 OP_SP2.6 78.23,40.64 75.82,38.23 v64.13,38.23
  Bottom 0.254: R6.1 26.8,38.23 v64.13,38.23
N$20
  Top 0.254: R15.1 16.51,31.75 OP_TH1.2 14.1,34.29 14.1,34.92 17.78,38.61 17.78,41.53 17.65,41.66 17.65,42.16 17.78,42.29 R17.2
N$21
  Top 0.254: OP_TH1.6 13.97,44.45 R17.1
  Bottom 0.254: R16.2 34.92,32.38 19.05,32.38 17.78,33.66 17.78,33.91 17.91,34.04 17.91,34.54 17.78,34.67 17.78,40.13 16.51,41.4 OP_TH1.6
N$22
  Top 0.254: R16.1 OP_TH2.2 36.83,34.8 32.89,38.73 32.89,43.05 R18.2
N$23
  Top 0.254: OP_TH2.6 40.64,43.18 40.64,43.31 | R18.1 40.64,43.31 | R19.1 43.05,43.31 40.64,43.31
N$24
  Top 0.254: 10.29,16.51 10.29,7.87 10.73,7.43 | 10.73,7.43 12.57,5.59 12.57,5.08 D14.A | ARDUINO_NANO1.4 93.98,1.27 12.32,1.27 9.02,4.57 9.02,5.71 10.73,7.43 | R6.2 20.45,35.69 20.45,27.18 10.29,17.02 10.29,16.51 | 10.29,16.51 D13.C
N$25
  Top 0.254: 25.53,16.51 25.53,7.87 27.81,5.59 27.81,5.08 D15.A 28.07,5.08 28.07,4.32 30.61,1.78 92.33,1.78 93.47,2.92 93.47,3.3 ARDUINO_NANO1.5 | R19.2 50.93,39.24 50.93,36.32 42.67,28.07 40.13,28.07 29.46,17.4 25.91,17.4 25.53,17.02 25.53,16.51 | 25.53,16.51 D3.C
N$26  (via drill 0.35)
  Top 0.254: OP_ERR.2 37.47,61.59 37.47,66.17 38.1,66.8 OP_ERR.6 | v17.78,80.77 4.06,80.77 2.67,82.17 2.67,144.02 14.61,155.96 14.61,156.21 ERR(0,V).1
  Bottom 0.254: v17.78,80.77 32.64,65.91 36.2,65.91 37.59,67.31 OP_ERR.6
N$27
  Top 0.254: ARDUINO_NANO1.29 87.5,12.83 87.5,56.39 105.03,73.91 105.16,73.91 105.54,74.3 106.68,74.3 SETPOINT(7,P,G).11
N$28
  Top 0.254: ARDUINO_NANO1.20 104.27,44.58 104.27,45.34 106.43,47.5 108.08,47.5 108.97,48.39 108.97,52.2 107.95,53.21 107.95,53.34 107.31,53.97 106.68,53.97 SETPOINT(7,P,G).3
N$29
  Bottom 0.254: ARDUINO_NANO1.21 102.87,40.64 106.3,40.64 106.43,40.77 106.93,40.77 107.06,40.64 107.82,40.64 112.14,44.96 112.14,52.2 107.82,56.52 106.68,56.52 SETPOINT(7,P,G).4
N$30
  Top 0.254: ARDUINO_NANO1.22 105.41,40.64 106.3,40.64 106.43,40.77 106.93,40.77 107.06,40.64 107.57,40.64 112.14,45.21 112.14,54.86 108.33,58.67 108.2,58.67 107.82,59.05 106.68,59.05 SETPOINT(7,P,G).5
N$31  (via drill 0.35)
  Top 0.254: ARDUINO_NANO1.23 89.03,26.54 89.03,45.34 98.81,55.12 v99.06,55.12
  Bottom 0.254: v99.06,55.12 105.54,61.59 106.68,61.59 SETPOINT(7,P,G).6
N$32
  Top 0.254: R20.1 101.85,55.88 106.17,51.56 106.68,51.56 SETPOINT(7,P,G).2
N$33
  Top 0.254: R27.1 90.3,68.71 90.3,79.88 90.23,79.95 | R26.2 90.23,79.95 | SETPOINT(7,P,G).14 106.68,81.91 105.54,81.91 103.63,80.01 90.3,80.01 90.23,79.95
N$34
  Top 0.254: R20.2 87.5,61.09 87.5,69.72 R27.2
  Bottom 0.254: ARDUINO_NANO1.12 112.65,40.26 112.65,79.63 107.82,84.45 106.68,84.45 | R27.2 101.47,83.69 104.78,83.69 105.54,84.45 106.68,84.45 | 106.68,84.45 SETPOINT(7,P,G).15
N$35
  Top 0.254: ARDUINO_NANO1.30 105.41,20.32 106.3,20.32 106.43,20.45 106.93,20.45 107.06,20.32 107.57,20.32 112.65,25.4 112.65,74.68 108.33,78.99 108.2,78.99 107.82,79.38 106.68,79.38 SETPOINT(7,P,G).13
N$38
  Top 0.254: 38.99,127.13 46.74,127.13 49.02,129.41 49.53,129.41 D16.A | 38.99,127.13 38.1,127.13 D17.C | 38.99,127.13 38.99,124.71 36.7,122.43 36.7,121.41 48.26,109.85 R22.2
  Bottom 0.254: OP_DRIVE.3 54.61,102.87 R22.2
N$39
  Top 0.254: R24.2 42.29,121.92 47.5,127.13 49.53,127.13 D16.C
  Bottom 0.254: R24.2 D12.C
N$40
  Top 0.254: 44.9,135.83 48.64,139.57 48.64,144.65 49.53,145.54 D10.A | 44.9,135.83 38.61,129.54 38.1,129.54 D17.A | R25.2 50.42,122.81 50.42,130.3 44.9,135.83
N$41
  Top 0.254: C1.1 25.02,117.22 25.02,122.05 17.27,129.79 17.27,132.08 R_FDB.1
  Bottom 0.254: 25.4,116.46 25.4,116.08 24.77,115.44 24.64,115.44 17.14,107.95 17.14,105.28 16.51,104.65 OP_INT.6 | R31.1 33.4,116.46 25.4,116.46 | 25.4,116.46 C1.1
N$42
  Top 0.254: R_PROP.2 63.5,72.52 63.63,72.39 63.63,66.17 OP_PROP.2 57.15,59.18 54.48,56.52 54.48,33.78 59.82,28.45 59.82,14.22 63.5,10.54 KP.C
N$44
  Top 0.254: R28.2 79.25,107.19 76.2,107.19 D5.C
  Bottom 0.254: OP_FAN.3 77.47,81.28 77.47,87.25 77.34,87.38 77.34,87.88 77.47,88.01 77.47,105.16 76.45,106.17 76.45,106.81 76.2,107.06 D5.C
N$45
  Top 0.254: R29.1 82.55,128.27 R30.2
  Bottom 0.254: OP_FAN.2 72.26,83.95 72.26,124.33 R30.2
N$47
  Top 0.254: OP_FAN.6 80.77,89.66 80.77,96.01 81.53,96.77 NPN_RGLTR.1
RGLTR_OUT  (via drill 0.35)
  Top 0.254: 3.49,93.03 3.43,93.09 3.43,131.83 15.49,143.89 15.62,143.89 R1.1 16.26,144.4 16.51,144.14 16.51,143.51 R_REF.2 | 3.49,93.03 IC2.1 | v3.43,82.55 3.43,92.96 3.49,93.03
  Bottom 0.254: SETPOINT.L 39.24,10.16 16.51,32.89 10.54,32.89 3.43,40 v3.43,82.55
TEC_GND
  Top 1.27: TEC(12,0,-12).2 80.77,155.45 100.08,155.45 102.49,157.86 102.74,157.86 TEC(V,0).2
TEC_PLUS
  Top 1.27: TEC(V,0).1 97.79,157.99 99.31,157.99 101.47,160.15 103.63,160.15 104.9,158.88 104.9,157.73 112.65,149.99 112.65,141.22 106.3,134.87 105.16,134.87 PNP.3 104.52,134.49 104.01,134.49 102.62,133.1 102.62,132.84 101.85,132.08 70.74,132.08 | OP_DRIVE.2 59.31,97.41 59.31,97.66 64.01,102.36 64.39,102.36 70.74,108.71 70.74,132.08 | 70.74,132.08 70.74,134.75 NPN.3
(copper drawn outside any net)
  shapes: Top area x4

## Text on the board
Top: Trapped Ions Lab, Rice University | Design: A. Menon, S. S Dey